# Altium PCB grupa2_PCB.PcbDoc
Units mm, origin at the board's own origin, x right, y up, seen from the top; angles counter-clockwise.
Board outline 143.26 x 60.25 mm, 2 copper layers (Top Layer, Bottom Layer); 46 components, 39 nets, 172 pads, 40 vias.
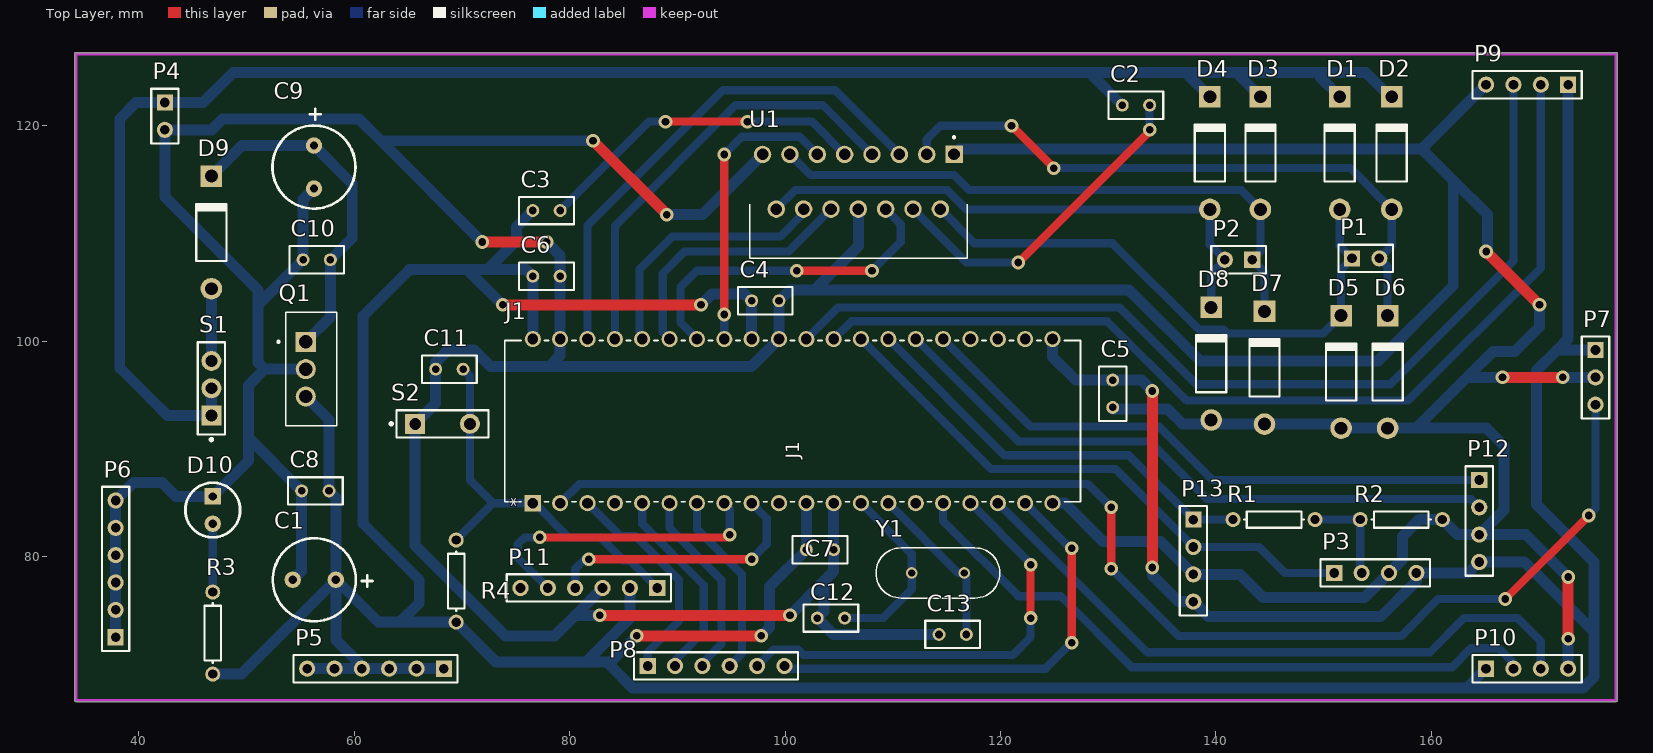
[diagram p0: Top Layer view]
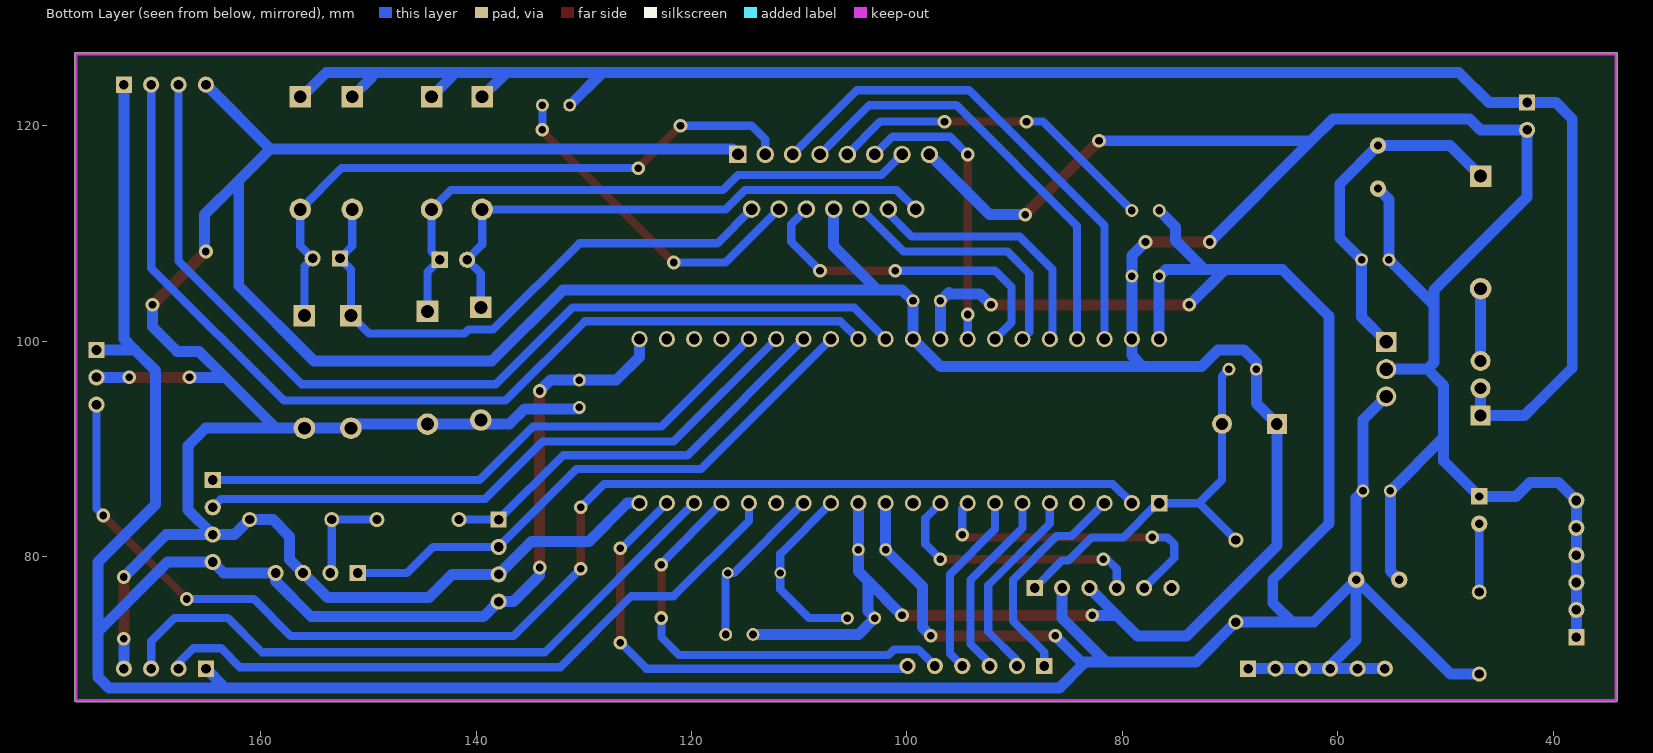
[diagram p1: Bottom Layer view, seen from below]

## Layer stack, top to bottom
Top Solder: solder mask 0.0102, Solder Resist, Dk 3.5
Top Layer: signal copper 0.0356
Dielectric 1: dielectric 0.32, FR-4, Dk 4.8
Bottom Layer: signal copper 0.0356
Bottom Solder: solder mask 0.0102, Solder Resist, Dk 3.5

## Board outline
34.163,66.548 cw(c34.163,66.675) 34.036,66.675 34.036,126.675 cw(c34.163,126.675) 34.163,126.802 177.165,126.802 cw(c177.165,126.675) 177.292,126.675 177.292,66.675 cw(c177.165,66.675) 177.165,66.548

## Design rules (kind name [scope] priority, off if disabled: settings)
Clearance [All] p1: gap=0.254 ignorepadtopadclearanceinfootprint=FALSE except(0: Arc-Hole Track-Hole SMDPad-Hole THPad-Hole Via-Hole Fill-Hole Poly-Hole Region-Hole Text-Hole)
PolygonConnect [All] p1: connectstyle=Relief reliefconductorwidth=0.254 reliefentries=4 polygonreliefangle="90 Angle" airgapwidth=0.254
RoutingVias [All] p1: holewidth=0.711 width=1.27 viastyle="Through Hole" minholewidth=0.711 minwidth=1.27 maxholewidth=0.711 maxwidth=1.27
SolderMaskExpansion [All] p1: expansion=0.102
Width signali [InNetClass('signali')] p1: maxlimit=0.762 minlimit=0.635 preferedwidth=0.762
Width napon [InNetClass('napon')] p2: maxlimit=1.016 minlimit=0.889 preferedwidth=1.016
30 further rules are at their usual default settings.

## Classes and differential pairs
net class signali: D0 D1 Echo1 Echo2 IN1_Motor1 IN2_Motor1 IN3_Motor2 IN4_Motor2 MCLR NetC2_1 NetC3_2 NetC12_2 NetC13_1 NetD1_1 NetD2_1 NetD3_1 NetD4_1 NetD10_1 NetJ1_2 NetJ1_3 NetJ1_5 NetJ1_6 NetJ1_7 NetP3_2 PGC PGD RA11 RD3 RX1 RX_UART2 Trig1 Trig2 TX1 TX_UART2
net class napon: 5V 9V GND NetC9_1 NetD9_1

## Components (designator, comment, footprint, x,y, rotation, side; value= is the part's Value field where it differs from the comment)
C1 "Cap Pol1" "elektrolitski kondenzator" 56.293,77.851 r180 top value=470uF
C2 "Cap" RAD-0.1 132.588,121.92 r180 top value=100nF
C3 "Cap" RAD-0.1 77.851,112.141 r0 top value=100nF
C4 "Cap" RAD-0.1 98.171,103.759 r180 top value=100nF
C5 "Cap" RAD-0.1 130.429,95.123 r90 top value=100nF
C6 "Cap" RAD-0.1 77.851,106.045 r180 top value=100nF
C7 "Cap" RAD-0.1 103.251,80.645 r180 top value=100nF
C8 "Cap" RAD-0.1 56.388,86.106 r0 top value=100nF
C9 "Cap Pol1" "elektrolitski kondenzator" 56.261,116.173 r270 top value=470uF
C10 "Cap" RAD-0.1 56.515,107.569 r0 top value=100nF
C11 "Cap" RAD-0.1 68.834,97.409 r0 top value=100nF
C12 "Cap" RAD-0.1 104.267,74.295 r0 top value=22pF
C13 "Cap" RAD-0.1 115.57,72.771 r180 top value=22pF
D1 "Diode 1N4001" DO-41 151.511,117.475 r90 top
D2 "Diode 1N4001" DO-41 156.337,117.475 r90 top
D3 "Diode 1N4001" DO-41 144.145,117.475 r90 top
D4 "Diode 1N4001" DO-41 139.446,117.475 r90 top
D5 "Diode 1N4001" DO-41 151.638,97.155 r90 top
D6 "Diode 1N4001" DO-41 155.956,97.155 r90 top
D7 "Diode 1N4001" DO-41 144.526,97.536 r90 top
D8 "Diode 1N4001" DO-41 139.573,97.917 r90 top
D9 "Diode 1N4001" DO-41 46.736,110.109 r90 top
D10 "LED0" "LED dioda" 46.863,84.328 r270 top
J1 "DSPIC30F4013" PDIP40_600MC_MCH 76.581,84.963 r90 top
P1 "Motor1" HDR1X2 152.654,107.696 r0 top
P2 "Motor2" HDR1X2 143.383,107.569 r180 top
P3 "Bluetooth konektor" HDR1X4 151.003,78.486 r0 top
P4 "Header 2" HDR1X2 42.418,122.174 r270 top
P5 "5V" HDR1X6 68.326,69.596 r180 top
P6 "GND" HDR1X6 37.846,72.517 r90 top
P7 "GP2Y" HDR1X3 175.26,99.187 r270 top
P8 "Header 6" HDR1X6 87.249,69.85 r0 top
P9 "1. senzor HC-SR04" HDR1X4 172.72,123.825 r180 top
P10 "2. senzor HC-SR04" HDR1X4 165.1,69.596 r0 top
P11 "Program" HDR1X6 88.138,77.089 r180 top
P12 "UART1" HDR1X4 164.465,87.122 r270 top
P13 "UART2" HDR1X4 137.922,83.439 r270 top
Q1 "LM7805CT/NOPB" TO254P1054X470X1955-3 55.499,97.409 r270 top
R1 "Res1" AXIAL-0.3 145.415,83.439 r180 top value=4k7
R2 "Res1" AXIAL-0.3 157.226,83.439 r180 top value=10k
R3 "Res1" AXIAL-0.3 46.863,72.898 r270 top value=1k
R4 "Res1" AXIAL-0.3 69.469,77.724 r270 top value=4k7
S1 "SW-SPST" SPST-2 46.736,95.631 r90 top
S2 "SW-PB" SPST-2 68.199,92.329 r0 top
U1 "L298N" TO127P2020X500X2100-15 115.697,117.348 r270 top
Y1 "HC-49/U-S16000000ABJB" XTAL_HC49P488W43L1150T466H350 114.2,78.486 r0 top

## Footprints (in the part's own frame and the unit in brackets; to place one, negate y for a bottom-side part, rotate by r counter-clockwise, add the part's x,y. Pads: shape width x height; smd on the part's side, far side on the other; paste and mask are expansions set on the pad)
AXIAL-0.3 [mm] "Axial Device, Thru-Hole; 2 Leads; 0.3 in Pin Spacing"
  round 1.4 hole 0.85: 1(-3.81,0) 2(3.81,0)
  silkscreen extent -2.77,-0.76 2.77,0.76
DO-41 [mm] "Diode, Axial; Body 5.2 x 2.7 mm (LxDia. max), Lead Dia. 0.86 mm (max)"
  round 2 hole 1.2: 1(-5.23,0)
  rect 2x2 hole 1.2: 2(5.23,0)
  silkscreen extent -2.65,-1.4 2.75,1.4
"elektrolitski kondenzator" [mil]
  round 60 hole 30: 1(-78.74,0) 2(78.74,0)
  silkscreen extent -213,-152 152,152
HDR1X2 [mm] "Connector; Header; 2 Position"
  rect 1.5x1.5 hole 0.9: 1(0,0)
  round 1.5 hole 0.9: 2(2.54,0)
  silkscreen extent -1.27,-1.27 3.81,1.27
HDR1X3 [mm] "Connector; Header; 3 Position"
  rect 1.5x1.5 hole 0.9: 1(0,0)
  round 1.5 hole 0.9: 2(2.54,0) 3(5.08,0)
  silkscreen extent -1.27,-1.27 6.35,1.27
HDR1X4 [mm] "Connector; Header; 4 Position"
  rect 1.5x1.5 hole 0.9: 1(0,0)
  round 1.5 hole 0.9: 2(2.54,0) 3(5.08,0) 4(7.62,0)
  silkscreen extent -1.27,-1.27 8.89,1.27
HDR1X6 [mm] "Connector; Header; 6 Position"
  rect 1.5x1.5 hole 0.9: 1(0,0)
  round 1.5 hole 0.9: 2(2.54,0) 3(5.08,0) 4(7.62,0) 5(10.16,0) 6(12.7,0)
  silkscreen extent -1.27,-1.27 13.97,1.27
"LED dioda" [mil]
  round 60 hole 30: 1(50,0)
  rect 60x60 hole 30: 2(-50,0)
  silkscreen extent -100,-100 100,100
PDIP40_600MC_MCH [mil]
  rect 59x59 hole 39 paste-99999 mask+0: 1(0,0)
  round 59 hole 39 paste-99999 mask+0: 2(0,-100) 3(0,-200) 4(0,-300) 5(0,-400) 6(0,-500) 7(0,-600) 8(0,-700) 9(0,-800) 10(0,-900) 11(0,-1000) 12(0,-1100) 13(0,-1200) 14(0,-1300) 15(0,-1400) 16(0,-1500) 17(0,-1600) 18(0,-1700) 19(0,-1800) 20(0,-1900) 21(600,-1900) 22(600,-1800) 23(600,-1700) 24(600,-1600) 25(600,-1500) 26(600,-1400) 27(600,-1300) 28(600,-1200) 29(600,-1100) 30(600,-1000) 31(600,-900) 32(600,-800) 33(600,-700) 34(600,-600) 35(600,-500) 36(600,-400) 37(600,-300) 38(600,-200) 39(600,-100) 40(600,0)
  silkscreen extent 5,-2002 595,103, body extent -5,-1997 615,97, height 255
RAD-0.1 [mm] "Radial Cap, Thru-Hole; 2 Leads; 0.1 in Pin Spacing"
  round 1.2 hole 0.7: 1(-1.27,0) 2(1.27,0)
  silkscreen extent -2.54,-1.27 2.54,1.27
SPST-2 [mm] "Switch; 2 Leads"
  rect 1.85x1.85 hole 1.1: 1(-2.54,0)
  round 1.85 hole 1.1: 2(2.54,0)
  silkscreen extent -4.89,-1.27 4.28,1.27
TO127P2020X500X2100-15 [mm]
  rect 1.62x1.62 hole 1.08: 1(0,0)
  round 1.62 hole 1.08: 2(5.08,-1.27) 3(0,-2.54) 4(5.08,-3.81) 5(0,-5.08) 6(5.08,-6.35) 7(0,-7.62) 8(5.08,-8.89) 9(0,-10.16) 10(5.08,-11.43) 11(0,-12.7) 12(5.08,-13.97) 13(0,-15.24) 14(5.08,-16.51) 15(0,-17.78)
  silkscreen extent -1.69,-18.99 9.63,1.21
TO254P1054X470X1955-3 [mm]
  rect 1.86x1.86 / inner round 1.86 / far side rect 1.86x1.86 hole 1.24: 1(-2.54,0)
  round 1.86 hole 1.24: 2(0,0) 3(2.54,0)
  silkscreen extent -5.27,-2.64 5.27,2.86
XTAL_HC49P488W43L1150T466H350 [mm]
  round 1.08 hole 0.68: 1(-2.44,0) 2(2.44,0)
  silkscreen extent -5.75,-2.33 5.75,2.33, body extent -5.75,-2.33 5.75,2.33, height 3.5

## Part data
C1 C9: "Polarized Capacitor (Radial)", LatestRevisionDate=17-Jul-2002, LatestRevisionNote="Re-released for DXP Platform.", PackageDescription="Polarized Capacitor (Radial); 2 Leads", PackageReference=RB7.6-15, Published=8-Jun-2000, Publisher="Altium Limited"
C2 C3 C4 C5 C6 C7 C8 C10 C11 C12 C13: "Capacitor", LatestRevisionDate=17-Jul-2002, LatestRevisionNote="Re-released for DXP Platform.", PackageDescription="Radial Cap, Thru-Hole; 2 Leads; 0.3 in Pin Spacing", PackageReference=RAD-0.3, Published=8-Jun-2000, Publisher="Altium Limited"
D1 D2 D3 D4 D5 D6 D7 D8 D9: "1 Amp General Purpose Rectifier", Code_JEDEC=DO-204-AL, ComponentLink1Description="Manufacturer Link", ComponentLink1URL=http://www.fairchildsemi.com/, ComponentLink2Description=Datasheet, ComponentLink2URL=http://www.fairchildsemi.com/ds/1N%2F1N4001.pdf, DatasheetVersion=1998, LatestRevisionDate=17-Jul-2002, LatestRevisionNote="Re-released for DXP Platform.", PackageDescription="Diode, Axial; Body 5.2 x 2.7 mm (LxDia. max), Lead Dia. 0.86 mm (max)", PackageReference=DO-41, PackageVersion=Aug-1999, Published=8-Jun-2000, Publisher="Altium Limited"
D10: "Typical INFRARED GaAs LED", LatestRevisionDate=08-Jul-2005, LatestRevisionNote="Mech Layer 1 removed.", PackageDescription="LED; 2 Leads", PackageReference=LED-0, Published=8-Jun-2000, Publisher="Altium Limited"
J1: library part DSPIC30F4013-30I/P, "Digital Signal Processors, DSP, DSC General Purpose", Package="DIP-40 Microchip", Check_prices=https://www.snapeda.com/parts/DSPIC30F4013-30I/P/Microchip/view-part/?ref=eda, MF=Microchip, MP=DSPIC30F4013-30I/P, SnapEDA_Link=https://www.snapeda.com/parts/DSPIC30F4013-30I/P/Microchip/view-part/?ref=snap
P1 P2: library part "Header 2", "Header, 2-Pin", LatestRevisionDate=17-Jul-2002, LatestRevisionNote="Re-released for DXP Platform.", Publisher="Altium Limited"
P3 P12 P13: library part "Header 4H", "Header, 4-Pin, Right Angle", LatestRevisionDate=17-Jul-2002, LatestRevisionNote="Re-released for DXP Platform.", Publisher="Altium Limited"
P4: "Header, 2-Pin", LatestRevisionDate=17-Jul-2002, LatestRevisionNote="Re-released for DXP Platform.", Publisher="Altium Limited"
P5 P6 P11: library part "Header 6", "Header, 6-Pin", LatestRevisionDate=17-Jul-2002, LatestRevisionNote="Re-released for DXP Platform.", Publisher="Altium Limited"
P7: library part "Header 3", "Header, 3-Pin", LatestRevisionDate=17-Jul-2002, LatestRevisionNote="Re-released for DXP Platform.", Publisher="Altium Limited"
P8: "Header, 6-Pin", LatestRevisionDate=17-Jul-2002, LatestRevisionNote="Re-released for DXP Platform.", Publisher="Altium Limited"
P9 P10: library part "Header 4", "Header, 4-Pin", LatestRevisionDate=17-Jul-2002, LatestRevisionNote="Re-released for DXP Platform.", Publisher="Altium Limited"
Q1: Package=None, Availability=Unavailable, MF="{'manufacturer': u'Texas Instruments'}", MP=LM7805CT/NOPB, Price=None
R1 R2 R3 R4: "Resistor", LatestRevisionDate=17-Jul-2002, LatestRevisionNote="Re-released for DXP Platform.", PackageDescription="Axial Device, Thru-Hole; 2 Leads; 0.3 in Pin Spacing", PackageReference=AXIAL-0.3, Published=8-Jun-2000, Publisher="Altium Limited"
S1: "Single-Pole, Single-Throw Switch", LatestRevisionDate=17-Jul-2002, LatestRevisionNote="Re-released for DXP Platform.", PackageDescription="Switch; 2 Leads", PackageReference=SPST-2, Published=24-Mar-1999, Publisher="Altium Limited"
S2: "Switch", LatestRevisionDate=17-Jul-2002, LatestRevisionNote="Re-released for DXP Platform.", PackageDescription="Switch; 2 Leads", PackageReference=SPST-2, Published=24-Mar-1999, Publisher="Altium Limited"
U1: "Dual Full Bridge Motor Driver 15-Pin(15+Tab) MULTIWATT V Tube", Package=None, Availability=Unavailable, MP=L298N, Price=None
Y1: "16 MHz ±30ppm Crystal 18pF 50 Ohms HC-49/US", Package="HC-49/US Citizen Finetech Miyota", Check_prices=https://www.snapeda.com/parts/HC-49/U-S16000000ABJB/Citizen/view-part/?ref=eda, MF="Citizen Finedevice", MP=HC-49/U-S16000000ABJB, SnapEDA_Link=https://www.snapeda.com/parts/HC-49/U-S16000000ABJB/Citizen/view-part/?ref=snap

## Free pads (board coordinates)
  round 1.85 hole 1.1: 3(46.736,95.631)

## Via types
v1: diameter 1.27, hole 0.711, Top Layer to Bottom Layer, 40 vias

## Nets (pads, with @x,y where several pads share a name; then routed paths per layer and width w, separated by ;. In a path a pad name is that pad's centre, name@x,y a point inside that pad or via, vN(x,y) a via of type N, cw(c..) or ccw(c..) an arc to the next point about the centre after c; other vN are vias at no path point)
5V: C1.1 C3.1 C4.2 C5.2 C6.2 C7.2 C8.2 J1.11 J1.21 J1.32 J1.40 P3.4 P5.1 P5.2 P5.3 P5.4 P5.5 P5.6 P7.1 P9.1 P10.1 P11.2 P12.4 P13.4 Q1.3 R3.2 R4.2 | length 450.3
  Top Layer w1.016: v1(73.787,103.378) v1(92.202,103.378) ; v1(86.233,72.644) v1(97.79,72.644) ; v1(134.112,78.994) 134.112,95.123 134.239,95.25 v1(134.112,95.377)
  Bottom Layer w1.016: R3.2 49.53,69.088 C1.1 ; Q1.3 57.658,92.71 C8.2 58.293,85.471 C1.1 ; P5.6 P5.5 P5.4 ; P5.1 P5.2 P5.3 P5.4 ; v1(73.787,103.378) 70.485,106.68 ; J1.40 C6.2 75.946,106.68 72.39,106.68 ; C3.1 75.057,110.617 75.057,109.347 72.39,106.68 ; 83.439,70.231 81.534,70.231 ; P11.2 85.598,74.295 81.534,70.231 ; v1(86.233,72.644) 83.629,70.04 85.852,67.818 163.322,67.818 ; v1(92.202,103.378) 93.218,104.394 95.962,104.394 96.089,104.521 96.851,103.759 C4.2 J1.32 ; v1(97.79,72.644) 98.552,73.406 98.552,77.216 C7.2 J1.11 ; J1.21 124.841,98.552 127,96.393 C5.2 133.096,96.393 v1(134.112,95.377) ; v1(134.112,78.994) 134.112,78.232 136.525,75.819 P13.4 139.319,74.422 155.321,74.422 158.623,77.724 P3.4 163.449,78.486 P12.4 168.656,79.502 175.133,73.025 ; P10.1 163.322,67.818 ; P9.1 172.72,100.203 171.704,99.187 ; P7.1 171.704,99.187 ; C1.1 58.293,72.263 60.706,69.85 P5.4 ; C1.1 62.23,73.914 64.262,73.914 ; 64.262,73.914 66.04,75.692 66.04,77.851 60.833,83.058 60.833,102.362 65.151,106.68 70.485,106.68 ; 64.262,73.914 R4.2 73.152,70.231 81.534,70.231 ; 70.485,106.68 72.39,106.68 ; 163.322,67.818 174.117,67.818 175.133,68.834 175.133,73.025 ; 171.704,99.187 169.799,97.282 169.799,84.836 175.133,79.502 175.133,73.025
9V: C2.2 D1.2 D2.2 D3.2 D4.2 P4.1 pad.3 S1.1 | length 169.3
  Bottom Layer w1.016: pad.3 S1.1 42.672,93.091 41.148,94.615 38.227,97.536 38.227,120.65 39.751,122.174 P4.1 45.974,122.174 48.768,124.968 149.733,124.968 ; 128.524,124.714 C2.2 ; 137.437,124.714 D4.2 ; 142.24,124.61 D3.2 ; D1.2 149.733,124.483 149.733,124.968 ; D2.2 156.187,122.705 153.924,124.968 149.733,124.968
D0: J1.34 U1.6 | length 31.3
  Top Layer w0.762: v1(101.092,106.553) v1(108.077,106.553)
  Bottom Layer w0.762: J1.34 90.297,101.727 90.297,105.029 91.821,106.553 v1(101.092,106.553) ; v1(108.077,106.553) 110.744,109.22 110.744,110.871 U1.6
D1: J1.33 U1.11 | length 27.3
  Top Layer w0.762: v1(94.361,102.489) v1(94.361,117.348)
  Bottom Layer w0.762: J1.33 v1(94.361,102.489) ; v1(94.361,117.348) 96.012,118.999 101.346,118.999 U1.11 U1.11@102.997,117.221
Echo1: J1.30 P9.3 | length 90.9
  Bottom Layer w0.762: J1.30 104.902,103.124 131.064,103.124 138.176,96.012 156.21,96.012 167.64,107.442 P9.3
Echo2: J1.18 P10.3 | length 60.9
  Bottom Layer w0.762: J1.18 133.604,71.12 159.893,71.12 163.068,74.295 168.021,74.295 170.18,72.136 P10.3
GND: C1.2 C4.1 C5.1 C6.1 C7.1 C8.1 C9.2 C10.1 C11.1 C12.1 C13.2 D5.1 D6.1 D7.1 D8.1 D10.2 J1.12 J1.20 J1.31 J1.39 P3.3 P4.2 P6.1 P6.2 P6.3 P6.4 P6.5 P6.6 P7.2 P9.4 P10.4 P11.3 P12.3 P13.3 Q1.2 R2.1 S2.1 U1.1 U1.8 U1.15 | length 616
  Top Layer w1.016: v1(71.882,109.22) v1(77.851,109.22) ; v1(82.169,118.618) v1(89.027,111.76) ; v1(82.804,74.549) v1@100.33,74.549 ; v1(165.1,108.331) v1(170.053,103.378) ; v1(166.624,96.647) v1(172.212,96.647) ; v1(172.72,72.39) v1(172.72,78.105)
  Bottom Layer w1.016: P6.1 P6.2 P6.3 P6.4 P6.5 P6.6 39.497,86.868 42.164,86.868 43.434,85.598 D10.2 50.165,88.9 50.165,91.059 ; C1.2 55.118,78.676 C8.1 50.165,91.059 ; Q1.2 51.689,97.409 ; C9.2 55.245,113.157 C10.1 51.054,103.378 ; v1(71.882,109.22) 62.484,118.618 ; v1(77.851,109.22) 79.121,107.95 C6.1 J1.39 79.121,98.679 78.105,97.663 ; v1(82.169,118.618) 62.484,118.618 ; v1(82.804,74.549) 80.518,74.549 ; P11.3 80.518,74.549 ; v1(89.027,111.76) 92.329,111.76 U1.15 ; v1(100.457,74.549) 103.632,77.724 ; J1.12 C7.1 104.521,78.613 103.632,77.724 ; U1.8 106.807,108.839 102.743,104.775 ; C13.2 104.521,72.771 C12.1 103.632,74.93 103.632,77.724 ; U1.1 116.205,117.856 159.131,117.856 ; J1.20 125.984,84.963 129.54,81.407 134.874,81.407 P13.3 142.24,78.359 144.399,76.2 153.797,76.2 P3.3 157.321,79.724 157.321,81.883 158.877,83.439 R2.1 162.433,82.042 P12.3 ; C5.1@130.429,93.726 135.509,93.726 136.929,92.306 D7.1 151.257,92.306 D5.1 D6.1 158.6,91.925 ; v1(165.1,108.331) 165.227,108.458 165.227,111.76 162.052,114.935 ; P9.4 159.131,117.856 ; v1(166.624,96.647) 163.576,96.647 163.449,96.774 ; v1(170.053,103.378) 170.053,101.346 167.767,99.06 165.735,99.06 163.449,96.774 ; v1(172.212,96.647) P7.2 ; P10.4 v1(172.72,72.39) ; v1(172.72,78.105) 168.783,82.042 P12.3 ; 50.165,91.059 50.165,95.885 51.689,97.409 ; 51.054,103.378 51.054,104.775 42.418,113.411 P4.2 46.736,119.634 47.752,120.65 60.452,120.65 62.484,118.618 ; 51.054,103.378 51.054,98.044 51.689,97.409 ; 78.105,97.663 96.901,97.663 J1.31 C4.1 100.457,104.775 102.743,104.775 ; 78.105,97.663 72.644,97.663 71.12,99.187 68.707,99.187 67.564,98.044 C11.1 67.564,94.234 S2.1 65.659,81.026 74.041,72.644 78.613,72.644 80.518,74.549 ; 102.743,104.775 131.953,104.775 138.557,98.171 155.067,98.171 162.052,105.156 162.052,114.935 ; 158.6,91.925 165.123,91.925 166.751,90.297 166.751,84.328 P12.3 ; 158.6,91.925 163.449,96.774 ; 159.131,117.856 162.052,114.935
IN1_Motor1: J1.38 U1.5 | length 47.2
  Bottom Layer w0.762: J1.38 81.661,110.744 94.234,123.317 104.648,123.317 U1.5
IN2_Motor1: J1.37 U1.7 | length 40.9
  Bottom Layer w0.762: J1.37 84.201,110.698 95.423,121.92 103.505,121.92 U1.7
IN3_Motor2: J1.35 U1.10 | length 24.5
  Bottom Layer w0.762: J1.35 88.646,100.838 88.646,106.299 90.678,108.331 100.33,108.331 U1.10
IN4_Motor2: J1.36 U1.12 | length 24.4
  Bottom Layer w0.762: J1.36 86.487,100.457 86.487,106.68 89.535,109.728 99.568,109.728 101.727,111.887 U1.12
MCLR: C11.2 J1.1 P11.1 R4.1 S2.2 | length 37
  Bottom Layer w0.762: R4.1 72.898,84.963 ; C11.2 70.739,96.774 S2.2 70.739,87.122 72.898,84.963 ; P11.1 85.598,79.629 85.017,79.629 82.858,81.788 79.901,81.788 76.726,84.963 J1.1 72.898,84.963
NetC2_1: C2.1 U1.4 | length 31.7
  Top Layer w0.762: v1(121.666,107.315) 133.985,119.634 v1(133.858,119.634)
  Bottom Layer w0.762: U1.4 116.84,107.315 v1(121.666,107.315) ; v1(133.858,119.634) C2.1
NetC3_2: C3.2 U1.9 | length 31.1
  Top Layer w0.762: v1(88.9,120.396) v1(96.52,120.396)
  Bottom Layer w0.762: C3.2 87.376,120.396 v1(88.9,120.396) ; v1(96.52,120.396) 102.489,120.396 U1.9
NetC9_1: C9.1 C10.2 D9.2 Q1.1 | length 32.2
  Bottom Layer w1.016: D9.2 49.57,118.173 C9.1 59.817,114.617 59.817,109.601 C10.2 57.785,102.235 Q1.1
NetC12_2: C12.2 J1.13 Y1.1 | length 17.3
  Bottom Layer w0.762: C12.2 109.093,74.295 111.76,76.962 Y1.1 111.76,80.264 J1.13
NetC13_1: C13.1 J1.14 Y1.2 | length 15.5
  Bottom Layer w0.762: J1.14 116.078,78.486 Y1.2 116.84,78.286 C13.1
NetD1_1: D1.1 D5.2 P1.1 U1.2 | length 53.6
  Bottom Layer w0.762: U1.2@114.531,112.372 U1.2 117.602,109.093 130.429,109.093 138.43,101.092 140.716,101.092 141.097,100.711 149.964,100.711 D5.2 151.638,106.68 P1.1 151.511,108.839 D1.1
NetD2_1: D2.1 D6.2 P1.2 U1.3 | length 59
  Top Layer w0.762: v1(121.031,120.015) v1(124.968,116.078)
  Bottom Layer w0.762: U1.3 113.157,118.745 114.427,120.015 v1(121.031,120.015) ; v1(124.968,116.078) 152.504,116.078 D2.1 156.337,108.839 P1.2 155.956,106.934 D6.2
NetD3_1: D3.1 D7.2 P2.1 U1.13 | length 56.1
  Bottom Layer w0.762: U1.13 102.362,115.443 115.697,115.443 117.094,114.046 142.344,114.046 D3.1 144.145,108.331 P2.1 144.526,106.426 D7.2
NetD4_1: D4.1 D8.2 P2.2 U1.14 | length 51.9
  Bottom Layer w0.762: U1.14 100.965,114.046 115.062,114.046 116.863,112.245 D4.1 139.446,108.966 P2.2 139.573,106.299 D8.2
NetD9_1: D9.1 S1.2 | length 6.7
  Bottom Layer w1.016: S1.2 D9.1
NetD10_1: D10.1 R3.1 | length 6.3
  Bottom Layer w0.762: R3.1 D10.1
NetJ1_2: J1.2 P7.3 | length 120.4
  Top Layer w0.762: v1(130.302,78.867) v1(130.302,84.582) ; v1(166.878,76.073) v1@174.498,83.693
  Bottom Layer w0.762: J1.2 80.899,86.741 128.143,86.741 v1(130.302,84.582) ; v1(130.302,78.867) 136.525,72.644 157.226,72.644 160.655,76.073 v1(166.878,76.073) ; v1(174.625,83.82) 175.26,84.455 P7.3
NetJ1_3: J1.3 P8.1 | length 20.7
  Bottom Layer w0.762: J1.3 84.709,81.915 86.106,81.915 90.17,77.851 90.17,74.041 87.249,71.12 P8.1
NetJ1_5: J1.5 P8.2 | length 18.6
  Bottom Layer w0.762: J1.5 86.741,83.058 92.456,77.343 92.456,73.025 89.789,70.358 P8.2
NetJ1_6: J1.6 P8.3 | length 17.8
  Bottom Layer w0.762: J1.6 89.281,82.677 94.107,77.851 94.107,71.882 92.329,70.104 P8.3
NetJ1_7: J1.7 P8.4 | length 17.3
  Bottom Layer w0.762: J1.7 91.821,82.55 96.012,78.359 96.012,70.993 P8.4
NetP3_2: P3.2 R1.1 R2.2 | length 9.2
  Bottom Layer w0.762: R1.1 R2.2 153.416,78.613 P3.2
PGC: J1.8 P11.5 | length 28.4
  Top Layer w0.762: v1(77.216,81.788) 94.615,81.788 v1(94.869,82.042)
  Bottom Layer w0.762: v1(77.216,81.788) 75.819,81.788 75.184,81.153 75.184,79.883 P11.5 ; J1.8 94.869,84.455 v1(94.869,82.042)
PGD: J1.9 P11.4 | length 24.9
  Top Layer w0.762: v1(81.788,79.756) v1(96.901,79.756)
  Bottom Layer w0.762: P11.4 80.518,78.867 81.407,79.756 v1(81.788,79.756) ; v1(96.901,79.756) 98.298,81.153 98.298,83.566 J1.9
RA11: J1.17 P8.5 | length 41.7
  Top Layer w0.762: v1(122.809,74.295) v1(122.809,79.248)
  Bottom Layer w0.762: P8.5 98.933,71.374 101.219,71.374 101.727,70.866 121.158,70.866 122.809,72.517 v1(122.809,74.295) ; J1.17 122.809,79.375 v1(122.809,79.248)
RD3: J1.19 P8.6 | length 42.6
  Top Layer w0.762: v1(126.619,72.009) v1(126.619,80.772)
  Bottom Layer w0.762: P8.6 100.203,69.596 124.206,69.596 v1(126.619,72.009) ; J1.19 126.492,80.772 v1(126.619,80.772)
RX1: J1.26 P12.2 | length 58.8
  Bottom Layer w0.762: J1.26 121.666,90.678 133.858,90.678 139.192,85.344 163.703,85.344 P12.2
RX_UART2: J1.28 P3.1 P13.2 | length 52.9
  Bottom Layer w0.762: J1.28 119.126,88.138 130.683,88.138 P13.2 144.018,80.899 146.431,78.486 P3.1
Trig1: J1.29 P9.2 | length 91.5
  Bottom Layer w0.762: J1.29 106.172,101.854 129.921,101.854 137.287,94.488 157.861,94.488 170.18,106.807 P9.2
Trig2: J1.16 P10.2 | length 62.1
  Bottom Layer w0.762: J1.16 114.681,83.312 121.666,76.327 125.603,76.327 132.207,69.723 161.925,69.723 163.703,71.501 166.243,71.501 167.64,70.104 P10.2
TX1: J1.25 P12.1 | length 55.2
  Bottom Layer w0.762: J1.25 122.809,92.075 134.747,92.075 139.7,87.122 P12.1
TX_UART2: J1.27 P13.1 R1.2 | length 38.9
  Bottom Layer w0.762: J1.27 120.396,89.408 131.953,89.408 P13.1 R1.2
pads on no net: J1.4 J1.10 J1.15 J1.22 J1.23 J1.24 P11.6

## Keep-outs
Keep-Out Layer:
  lines w0.254: 34.163,66.675 177.165,66.675 177.165,126.675 34.163,126.675 34.163,66.675

## Text inside footprints (layer, text, board x,y; h text height)
J1: Top Overlay "*" at 75.705,84.645 h1.27 r90; Mechanical 13 "*" at 77.216,85.153 h1.27 r90